# Altium PCB Quasar_ARM_плата.PcbDoc
Units mm, origin at the board's own origin, x right, y up, seen from the top; angles counter-clockwise.
Board outline 110.5 x 70.5 mm, 2 copper layers (Top Layer, Bottom Layer); 124 components, 86 nets, 362 pads, 28 vias.
Unrouted connection lines stored in the file: 1.
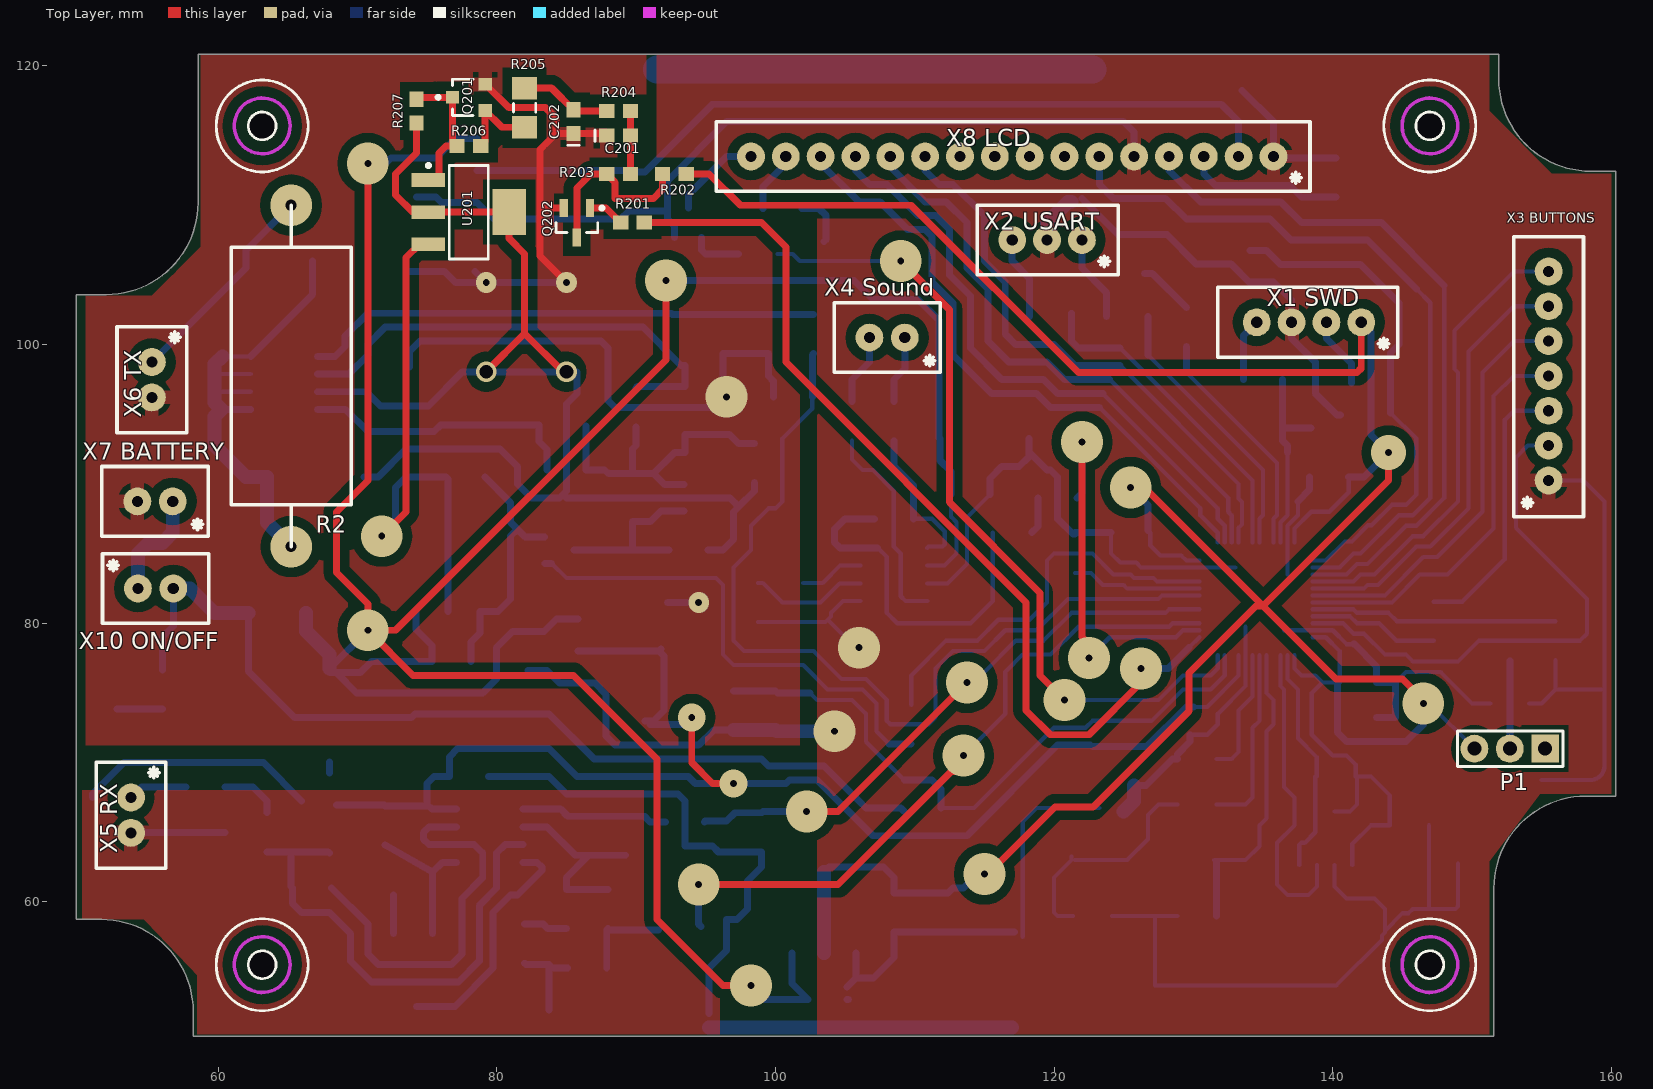
[diagram p0: Top Layer view]
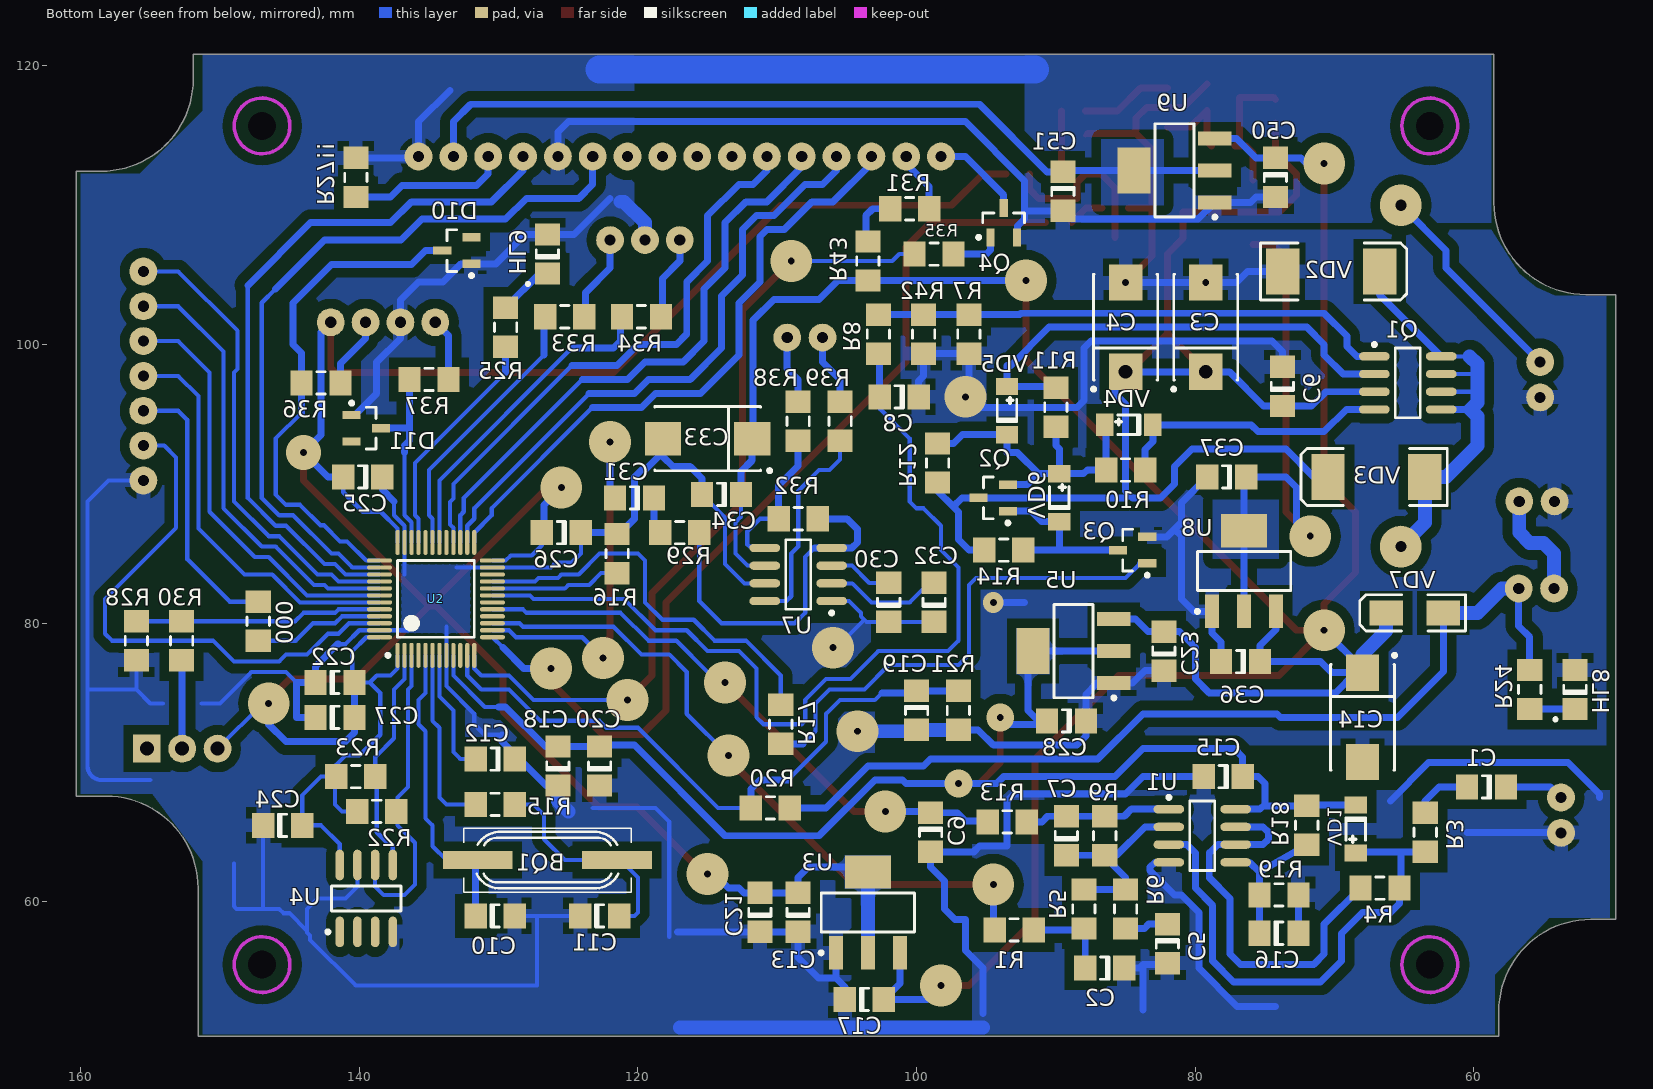
[diagram p1: Bottom Layer view, seen from below]

## Layer stack, top to bottom
Top Layer: signal copper 0.0356
Dielectric: dielectric 0.32, FR-4, Dk 4.8
Bottom Layer: signal copper 0.0356

## Board outline
151.92,120.844 151.92,119.044 ccw(c158.52,119.044) 158.52,112.444 160.32,112.444 160.32,67.594 158.17,67.594 ccw(c158.17,60.994) 151.57,60.994 151.57,50.344 58.22,50.344 58.22,52.144 ccw(c51.62,52.144) 51.62,58.744 49.82,58.744 49.82,103.594 51.97,103.594 ccw(c51.97,110.194) 58.57,110.194 58.57,120.844

## Design rules (kind name [scope] priority, off if disabled: settings)
Clearance Clearance_Polygon [InPolygon vs All  And  Not InNet(GND) And  Not InNet(VDD)  And  Not InNet(VDDA) And Not  InNet('+5V') And  Not InNet('VDDLCD')] p1: gap=0.7
Clearance Clearance_Polygon_1 [InPolygon] p2: gap=0.7
Clearance Clearance_LQFP_Pins [IsPad  And  InComponent(U2)] p3: gap=0.2
Clearance [All] p4: gap=0.2
DiffPairsRouting [All] p1: maxlimit=10 minlimit=0.5 mostfreqgap=0.5 maxuncoupledlength=20
HoleSize [All] p1: absolutevalues=TRUE maxlimit=5 minlimit=0.5 maxpercent=80.000 minpercent=20.000
MinimumSolderMaskSliver [All] p1: minsoldermaskwidth=0
PlaneClearance [All] p1: clearance=0.5
PlaneConnect [All] p1: planeconnectstyle=Direct reliefexpansion=0.508 reliefentries=4 reliefconductorwidth=0.5 reliefairgap=0
PolygonConnect PolygonConnect_VDDLCD [IsPoly And InNet(VDDLCD) vs InNet(VDDLCD)] p1: connectstyle=Direct reliefconductorwidth=0.254 reliefentries=4 polygonreliefangle="90 Angle" airgapwidth=0.254
PolygonConnect PolygonConnect_VIA [IsPoly vs IsVia] p2: connectstyle=Direct reliefconductorwidth=0.254 reliefentries=4 polygonreliefangle="90 Angle" airgapwidth=0.254
PolygonConnect PolygonConnect_+5v [IsPoly And  InNet('+5V') vs InNet('+5V')] p3: connectstyle=Direct reliefconductorwidth=0.254 reliefentries=4 polygonreliefangle="90 Angle" airgapwidth=0.254
PolygonConnect PolygonConnect_VDDA [IsPoly And  InNet(VDDA) vs InNet('VDDA')] p4: connectstyle=Direct reliefconductorwidth=0.254 reliefentries=4 polygonreliefangle="90 Angle" airgapwidth=0.254
PolygonConnect PolygonConnect_VDD [IsPoly  And InNet(VDD) vs InNet('VDD')] p5: connectstyle=Direct reliefconductorwidth=0.254 reliefentries=4 polygonreliefangle="90 Angle" airgapwidth=0.254
PolygonConnect [All] p6: connectstyle=Relief reliefconductorwidth=1 reliefentries=4 polygonreliefangle="90 Angle" airgapwidth=0.4
RoutingCorners [All] p1: cornerstyle=Round minsetback=2.54 maxsetback=5
RoutingVias [All] p1: holewidth=0.6 width=1.5 viastyle="Through Hole" minholewidth=0.5 minwidth=1 maxholewidth=0.8 maxwidth=3
SMDNeckDown [All] p1: percent=100.000
SMDToCorner [All] p1: distance=0
SMDToPlane [All] p1: distance=0
SilkToSilkClearance [All] p1: silktosilkclearance=0.1
SilkToSolderMaskClearance [IsPad] p1: minsilkscreentomaskgap=0 clearancetoexposedcopper=TRUE
SolderMaskExpansion [All] p1: expansion=0.102
Width [All] p1: maxlimit=5 minlimit=0.2 preferedwidth=0.5
20 further rules are at their usual default settings.

## Components (designator, comment, footprint, x,y, rotation, side; value= is the part's Value field where it differs from the comment)
000 "Comment" 8-1206 147.25,80.15 r90 bottom
BQ1 "8 MHz" HC49SMD 126.5,63 r0 bottom
C1 "C1206" 1206 59.1,68.25 r0 bottom
C2 "C1206" 1206 86.5,55.25 r0 bottom
C3 "T492D" D 79.25,101.25 r90 bottom
C4 "T492D" D 85,101.25 r90 bottom
C5 "C1206" 1206 82,57 r270 bottom
C6 "C1206" 1206 73.75,97 r90 bottom
C7 "C1206" 1206 89.25,64.75 r90 bottom
C8 "C1206" 1206 101.25,96.25 r0 bottom
C9 "C1206" 1206 99,65 r270 bottom
C10 "C1206" 1206 130.25,59 r180 bottom
C11 "C1206" 1206 122.75,59 r180 bottom
C12 "C1206" 1206 130.25,70.25 r0 bottom
C13 "C1206" 1206 108.5,59.25 r90 bottom
C14 "T492D" D 68,73.25 r270 bottom
C15 "C1206" 1206 78,69 r0 bottom
C16 "C1206" 1206 74,57.75 r180 bottom
C17 "C1206" 1206 103.75,53 r180 bottom
C18 "C1206" 1206 125.75,69.75 r90 bottom
C19 "C1206" 1206 100,73.75 r270 bottom
C20 "C1206" 1206 122.75,69.75 r90 bottom
C21 "C1206" 1206 111.25,59.25 r90 bottom
C22 "C1206" 1206 141.75,75.75 r180 bottom
C23 "C1206" 1206 82.25,78 r90 bottom
C24 "C1206" 1206 145.5,65.5 r180 bottom
C25 "C1206" 1206 139.75,90.5 r0 bottom
C26 "C1206" 1206 125.5,86.5 r0 bottom
C27 "C1206" 1206 141.75,73.25 r180 bottom
C28 "C1206" 1206 89.25,73 r0 bottom
C30 "C1206" 1206 102,81.5 r90 bottom
C31 "C1206" 1206 120.25,89 r0 bottom
C32 "C1206" 1206 98.75,81.5 r90 bottom
C33 "T492D" D 115,93.25 r0 bottom
C34 "C1206" 1206 114,89.25 r0 bottom
C36 "C1206" 1206 76.75,77.25 r0 bottom
C37 "C1206" 1206 77.75,90.5 r0 bottom
C50 "C1206" 1206 74.25,112 r270 bottom
C51 "C1206" 1206 89.5,111 r270 bottom
C201 "C1206" 0603 88.75,115 r0 top
C202 "C1206" 0603 85.5,116 r90 top
D10 "BZX84-C5V1" SOT23_N 133,106.75 r0 bottom
D11 "BZX84-C5V1" SOT23_N 139.5,94 r180 bottom
HL8 "S1206YGSC" C1206 52.75,75.25 r90 bottom
HL9 "S1206YGSC" C1206 126.5,106.5 r90 bottom
P1 "Header 3" "HDR1X3 - wide area" 155.25,71 r180 top
Q1 "IRF7105" SO-8_N 64.75,97.25 r180 bottom
Q2 "BC846B" SOT23_N 94.5,89 r0 bottom
Q3 "BC846B" SOT23_N 84.5,85.25 r0 bottom
Q4 "BC846B" SOT23_N 93.75,108.75 r90 bottom
Q201 "2N7002" SOT23 78,117.75 r90 top
Q202 "BC846" SOT23_N 85.75,108.75 r270 top
R1 "ERJ8EN" 8-1206 93,58 r180 bottom
R2 "Resistor" "Resistor MLT-2" 65.25,97.5 r0 top
R3 "ERJ8EN" 8-1206 63.5,65 r270 bottom
R4 "ERJ8EN" 8-1206 66.75,61 r180 bottom
R5 "ERJ8EN" 8-1206 88,59.5 r90 bottom
R6 "ERJ8EN" 8-1206 85,59.5 r270 bottom
R7 "ERJ8EN" 8-1206 96.25,100.75 r270 bottom
R8 "ERJ8EN" 8-1206 102.75,100.75 r270 bottom
R9 "ERJ8EN" 8-1206 86.5,64.75 r90 bottom
R10 "ERJ8EN" 8-1206 85,91 r0 bottom
R11 "ERJ8EN" 8-1206 90,95.5 r270 bottom
R12 "ERJ8EN" 8-1206 98.5,91.5 r270 bottom
R13 "ERJ8EN" 8-1206 93.5,65.75 r0 bottom
R14 "ERJ8EN" 8-1206 93.75,85.25 r0 bottom
R15 "ERJ8EN" 8-1206 130.25,67 r180 bottom
R16 "ERJ8EN" 8-1206 121.5,85 r90 bottom
R17 "ERJ8EN" 8-1206 109.75,72.75 r270 bottom
R18 "ERJ8EN" 8-1206 72,65.5 r90 bottom
R19 "ERJ8EN" 8-1206 74,60.5 r0 bottom
R20 "ERJ8EN" 8-1206 110.5,66.75 r180 bottom
R21 "ERJ8EN" 8-1206 97,73.75 r90 bottom
R22 "ERJ8EN" 8-1206 138.75,66.5 r180 bottom
R23 "ERJ8EN" 8-1206 140.25,69 r180 bottom
R24 "ERJ8EN" 8-1206 56,75.25 r90 bottom
R25 "ERJ8EN" 8-1206 129.5,101.25 r270 bottom
R27!! "ERJ8EN" 8-1206 140.25,112 r270 bottom (schematic designator R27!!!!!!!!!!)
R28 "ERJ8EN" 8-1206 156,78.75 r90 bottom
R29 "ERJ8EN" 8-1206 117,86.5 r180 bottom
R30 "ERJ8EN" 8-1206 152.75,78.75 r90 bottom
R31 "ERJ8EN" 8-1206 100.5,109.75 r180 bottom
R32 "ERJ8EN" 8-1206 108.5,87.5 r180 bottom
R33 "ERJ8EN" 8-1206 125.25,102 r0 bottom
R34 "ERJ8EN" 8-1206 119.75,102 r0 bottom
R35 "ERJ8EN" 8-1206 98.75,106.5 r180 bottom
R36 "ERJ8EN" 8-1206 142.75,97.25 r0 bottom
R37 "ERJ8EN" 8-1206 135,97.5 r0 bottom
R38 "ERJ8EN" 8-1206 108.5,94.5 r270 bottom
R39 "ERJ8EN" 8-1206 105.5,94.5 r270 bottom
R42 "ERJ8EN" 8-1206 99.5,100.75 r270 bottom
R43 "ERJ8EN" 8-1206 103.5,106 r270 bottom
R201 "ERJ8EN" 3-0603 89.75,108.75 r0 top
R202 "ERJ8EN" 3-0603 92.75,112.25 r0 top
R203 "ERJ8EN" 3-0603 88.75,112.25 r180 top
R204 "ERJ8EN" 3-0603 88.75,116.75 r0 top
R205 "ERJ8EN" 8-1206 82,117 r90 top
R206 "ERJ8EN" 3-0603 78,114.25 r180 top
R207 "ERJ8EN" 3-0603 74.25,116.75 r270 top
U1 "MCP6022-I/SN" SOIC-SN8_N 79.5,64.75 r180 bottom
U2 "STM32F100C8T6B" LQFP48_N 134.5,81.75 r90 bottom
U3 "LD1117S33TR" SOT-223_N 103.5,59.25 r90 bottom
U4 "AT24C08BN-SP25-B" 8S1_N 139.5,60.25 r90 bottom
U5 "LD1117S33TR" SOT-223_N 88.75,78 r0 bottom
U7 "MC34119D" 751-03_N 108.5,83.5 r0 bottom
U8 "LD1117S50CTR" SOT-223_N 76.5,83.75 r90 bottom
U9 "LD1117S50CTR (for LCD)" SOT-223_N 81.5,112.5 r0 bottom
U201 "LD1117S33CTR" SOT-223_N 78,109.5 r0 top
VD1 "LL4148" MiniMELF 68.5,65 r90 bottom
VD2 "MURS230T3" SMC 70.25,105.25 r180 bottom
VD3 "MURS230T3" SMC 67,90.5 r0 bottom
VD4 "LL4148" MiniMELF 85,94.25 r180 bottom
VD5 "LL4148" MiniMELF 93.5,95.5 r270 bottom
VD6 "LL4148" MiniMELF 89.75,89.25 r270 bottom
VD7 "sk16" SMA 64.25,80.75 r0 bottom
"X1 SWD" "WS-4" WS-4 141.75,101.5 r180 top
"X2 USART" "ws-3" WS-3 122,107.5 r180 top
"X3 BUTTONS" "WS-7" WS-7 155.5,90.25 r90 top
"X4 Sound" "WS-2" WS-2 109.29,100.5 r180 top
"X5 RX" "WS-2" WS-2 53.75,67.5 r270 top
"X6 TX" "WS-2" WS-2 55.25,98.75 r270 top
"X7 BATTERY" "WS-2" WS-2 56.75,88.75 r180 top
"X8 LCD" "WS-16" WS-16 135.75,113.5 r180 top
"X10 ON/OFF" "WS-2" WS-2 54.25,82.5 r0 top

## Footprints (in the part's own frame and the unit in brackets; to place one, negate y for a bottom-side part, rotate by r counter-clockwise, add the part's x,y. Pads: shape width x height; smd on the part's side, far side on the other; paste and mask are expansions set on the pad)
3-0603 [mm] "Chip Resistor; Body 1.6 x 0.9 mm (LxW typ)"
  rect 1.1x1 smd: 1(-0.85,0) 2(0.85,0)
8-1206 [mm] "Chip Resistor; Body 3.1 x 1.6 mm (LxW typ)"
  rect 1.6x1.8 smd: 1(-1.4,0) 2(1.4,0)
  silkscreen extent -0.3,-0.8 0.3,0.8
8S1_N [mm] "SOIC, 8-Leads, Body 4.9x3.9mm, Pitch 1.27mm, IPC Medium Density"
  oval 2.2x0.6 smd: 1(-2.4,1.905) 2(-2.4,0.635) 3(-2.4,-0.635) 4(-2.4,-1.905) 5(2.4,-1.905) 6(2.4,-0.635) 7(2.4,0.635) 8(2.4,1.905)
  silkscreen extent -2.52,-2.5 0.9,2.88, body extent -2,-2.5 2,2.5, height 1.75
0603 [mm] "Chip Capacitor; Body 1.6 x 0.8 mm (LxW typ)"
  rect 1.1x1 smd: 1(-0.85,0) 2(0.85,0)
  silkscreen extent -1.7,-0.4 -1.7,0.4
751-03_N [mm] "SOIC, 8-Leads, Body 4.9x3.9mm, Pitch 1.27mm, IPC Medium Density"
  oval 2.2x0.6 smd: 1(-2.4,1.905) 2(-2.4,0.635) 3(-2.4,-0.635) 4(-2.4,-1.905) 5(2.4,-1.905) 6(2.4,-0.635) 7(2.4,0.635) 8(2.4,1.905)
  silkscreen extent -2.52,-2.5 0.9,2.88, body extent -1.95,-2.45 1.95,2.45, height 1.75
1206 [mm] "Chip Capacitor; Body 3.2 x 1.6 mm (LxW typ)"
  rect 1.6x1.8 smd: 1(-1.4,0) 2(1.4,0)
  silkscreen extent -0.3,-0.8 0.3,0.8
C1206 [mm] "Chip Capacitor; Body 3.2 x 1.6 mm (LxW typ)"
  rect 1.6x1.8 smd: 1(-1.4,0) 2(1.4,0)
  silkscreen extent -2.18,-0.8 0.3,1.44
D [mm] "Capacitor, SM Tantalum; Body 7.3 x 4.3 mm (LxW typ)"
  rect 2.6x2.4 smd: 1(-3.2,0) 2(3.2,0)
  silkscreen extent -4.57,-2.3 3.8,2.43
HC49SMD [mm]
  rect 5x1.3 smd: 1(-5,0) 2(5,0)
  silkscreen extent -6,-2.3 6,2.3
"HDR1X3 - wide area" [mm] "Connector; Header; 3 Position"
  rect 2x2 hole 1: 1(0,0)
  round 2 hole 1: 2(2.54,0) 3(5.08,0)
  silkscreen extent -1.27,-1.27 6.3,1.27
LQFP48_N [mm] "Thin QFP, 48-Leads, Body 7x7mm, Pitch 0.5mm, IPC Medium Density"
  oval 1.8x0.3 smd: 1(-4.05,2.75) 2(-4.05,2.25) 3(-4.05,1.75) 4(-4.05,1.25) 5(-4.05,0.75) 6(-4.05,0.25) 7(-4.05,-0.25) 8(-4.05,-0.75) 9(-4.05,-1.25) 10(-4.05,-1.75) 11(-4.05,-2.25) 12(-4.05,-2.75) 25(4.05,-2.75) 26(4.05,-2.25) 27(4.05,-1.75) 28(4.05,-1.25) 29(4.05,-0.75) 30(4.05,-0.25) 31(4.05,0.25) 32(4.05,0.75) 33(4.05,1.25) 34(4.05,1.75) 35(4.05,2.25) 36(4.05,2.75)
  oval 0.3x1.8 smd: 13(-2.75,-4.05) 14(-2.25,-4.05) 15(-1.75,-4.05) 16(-1.25,-4.05) 17(-0.75,-4.05) 18(-0.25,-4.05) 19(0.25,-4.05) 20(0.75,-4.05) 21(1.25,-4.05) 22(1.75,-4.05) 23(2.25,-4.05) 24(2.75,-4.05) 37(2.75,4.05) 38(2.25,4.05) 39(1.75,4.05) 40(1.25,4.05) 41(0.75,4.05) 42(0.25,4.05) 43(-0.25,4.05) 44(-0.75,4.05) 45(-1.25,4.05) 46(-1.75,4.05) 47(-2.25,4.05) 48(-2.75,4.05)
  silkscreen extent -4.17,-2.75 2.75,3.58, body extent -3.5,-3.5 3.5,3.5, height 1.6
MiniMELF [mm]
  rect 1.25x1.6 smd: 1(-1.49,-0.01) 2(1.96,-0.01)
  silkscreen extent -0.7,-0.71 1.03,0.69
"Resistor MLT-2" [mm]
  round 3 hole 0.8: 1(0,12.5) 2(0,-12)
  silkscreen extent -4.3,-12 4.3,12.5
SMA [mm] "DO-214-AC/SMA; 2 C-Bend Leads; Body 5 x 2.7 mm, inc. leads (LxW)"
  rect 2.4x1.8 smd: 1(-2.05,0) 2(2.05,0)
  silkscreen extent -3.65,-1.3 3.95,1.3
SMC [mm] "DO-214-AB/SMC; 2 C-Bend Leads; Body 7.9 x 5.9 mm, inc. leads (LxW)"
  rect 2.4x3.3 smd: 1(-3.475,0) 2(3.475,0)
  silkscreen extent -5.07,-2.05 5.43,2.05
SO-8_N [mm] "SOIC, 8-Leads, Body 4.9x3.9mm, Pitch 1.27mm, IPC Medium Density"
  oval 2.2x0.6 smd: 1(-2.4,1.905) 2(-2.4,0.635) 3(-2.4,-0.635) 4(-2.4,-1.905) 5(2.4,-1.905) 6(2.4,-0.635) 7(2.4,0.635) 8(2.4,1.905)
  silkscreen extent -2.53,-2.5 0.9,2.88, body extent -2,-2.5 2,2.5, height 1.75
SOIC-SN8_N [mm] "SOIC, 8-Leads, Body 4.9x3.8mm, Pitch 1.27mm, IPC Medium Density"
  oval 2.2x0.6 smd: 1(-2.4,1.905) 2(-2.4,0.635) 3(-2.4,-0.635) 4(-2.4,-1.905) 5(2.4,-1.905) 6(2.4,-0.635) 7(2.4,0.635) 8(2.4,1.905)
  silkscreen extent -2.53,-2.5 0.9,2.88, body extent -2,-2.5 2,2.5, height 1.75
SOT23 [mm] "SOT-23; 3 Leads; Body 3.1 x 2.5 mm, inc. leads (LxW max), Alternate Lead Configuration"
  rect 0.9x0.95 smd: 1(0,1.175) 2(0.95,-1.175) 3(-0.95,-1.175)
  silkscreen extent -1.3,-0.3 1.3,2.32
SOT23_N [mm] "SOT23, 3-Leads, Body 2.9x1.3mm, Pitch 0.95mm, Lead Span 2.3mm, IPC Medium Density"
  rect 1.3x0.6 smd: 1(-1.05,0.95) 2(-1.05,-0.95) 3(1.05,0)
  silkscreen extent -1.17,-1.5 0.7,1.92, body extent -0.7,-1.5 0.7,1.5, height 1.1
SOT-223_N [mm] "SOT223, 4-Leads, Body 6.5x3.5mm, Pitch 2.3mm, Lead Span 7mm, IPC Medium Density"
  rect 2.4x1 smd: 1(-2.9,2.3) 2(-2.9,0) 3(-2.9,-2.3)
  rect 2.4x3.3 smd: 4(2.9,0)
  silkscreen extent -3.02,-3.35 1.4,3.48, body extent -1.85,-3.35 1.85,3.35, height 1.8
WS-2 [mm] "Connector 2-pin"
  round 2 hole 0.8: 1(0,0) 2(2.54,0)
  silkscreen extent -2.54,-2.5 5.08,2.5
WS-3 [mm] "Connector 3-pin"
  round 2 hole 0.8: 1(0,0) 2(2.5,0) 3(5,0)
  silkscreen extent -2.62,-2.5 7.5,2.5
WS-4 [mm] "Connector 4-pin"
  round 2 hole 0.8: 1(-0.3,-0.1) 2(2.2,-0.1) 3(4.7,-0.1) 4(7.2,-0.1)
  silkscreen extent -2.92,-2.6 10,2.4
WS-7 [mm] "Connector 7-pin"
  round 2 hole 0.8: 1(0,0) 2(2.5,0) 3(5,0) 4(7.5,0) 5(10,0) 6(12.5,0) 7(15,0)
  silkscreen extent -2.62,-2.5 17.5,2.5
WS-16 [mm] "Connector 16-pin"
  round 2 hole 0.8: 1(0,0) 2(2.5,0) 3(5,0) 4(7.5,0) 5(10,0) 6(12.5,0) 7(15,0) 8(17.5,0) 9(20,0) 10(22.5,0) 11(25,0) 12(27.5,0) 13(30,0) 14(32.5,0) 15(35,0) 16(37.5,0)
  silkscreen extent -2.62,-2.5 40,2.5

## Part data
BQ1: library part XTAL, "Crystal Oscillator"
C1 C2 C5 C6 C7 C8 C9 C10 C11 C12 C13 C15 C16 C17 C18 C19 C20 C21 C22 C23 C24 C25 C26 C27 C28 C30 C31 C32 C34 C36 C37 C50 C51 C201 C202: "Ceramic Chip Capacitor - Standard"
C3 C4 C14 C33: "Solid Tantalum Chip Capacitor, T492 Series - CWR11 Style Per Mil-PRF-55365/8"
D10 D11: "Voltage Regulator Diode"
HL8 HL9: library part "LED CMD", "Typical INFRARED GaAs LED"
P1: "Header, 3-Pin"
Q1: "HEXFET Power MOSFET"
Q2 Q3 Q4 Q202: "NPN General-purpose Transistor"
Q201: "N-Channel Enhancement Mode Vertical DMOS FET"
R1 R3 R4 R5 R6 R7 R8 R9 R10 R11 R12 R13 R14 R15 R16 R17 R18 R19 R20 R21 R22 R23 R24 R25 R27!! R28 R29 R30 R31 R32 R33 R34 R35 R36 R37 R38 R39 R42 R43 R201 R202 R203 R204 R205 R206 R207: "Precision Thick Film Chip Resistor, 10 Ohm to 2.2M Ohm Range, 1% Tolerance, 1206 Size, 0.125 W"
R2: library part Resistor_MLT
U1: "Rail-to-Rail Input/Output, 10 MHz Operational Amplifier, 8-Pin SOIC, Industrial Temperature"
U2: "STM32 ARM-based 32-bit MCU Value Line with 64 kB Flash, 8 kB Internal RAM, Internal Code B, -40 to +85°C Temperature, 48-Pin LQFP, Tray"
U3 U5: "Fixed Low Drop Positive Voltage Regulator, 3.3V, 4-Pin SOT-223, Tape and Reel"
U4: "8Kbit (1024 x 8), 2-wire Bus Automotive Serial EEPROM with Write Protect, 2.5V, 8-Pin SOIC, Bulk"
U7: "Low-Power Audio Amplifier"
U8: "Fixed Low Drop Positive Voltage Regulator, 5V, 4-Pin SOT-223, Tape and Reel"
U9 U201: library part LD1117S50CTR, "Fixed Low Drop Positive Voltage Regulator, 5V, 4-Pin SOT-223, Tape and Reel"
VD1 VD4 VD5 VD6: library part Diode
VD2 VD3: library part 30BQ015, "Schottky Rectifier"
VD7: library part 10MQ060N, "Schottky Rectifier"

## Free pads (board coordinates)
  round 0 hole 2: 0(146.975,55.5) 1(63.175,55.5) 2(63.175,115.7) 3(146.975,115.7)

## Via types
v1: diameter 3, hole 0.5, Top Layer to Bottom Layer, 20 vias
v2: diameter 1.5, hole 0.5, Top Layer to Bottom Layer, 3 vias
v3: diameter 1.5, hole 1, Top Layer to Bottom Layer, 2 vias
v4: diameter 2.5, hole 0.5, Top Layer to Bottom Layer, 1 vias
v5: diameter 2, hole 0.5, Top Layer to Bottom Layer, 1 vias
v6: diameter 2, hole 0.5, Top Layer to Bottom Layer, tented top, 1 vias

## Nets (pads, with @x,y where several pads share a name; then routed paths per layer and width w, separated by ;. In a path a pad name is that pad's centre, name@x,y a point inside that pad or via, vN(x,y) a via of type N, cw(c..) or ccw(c..) an arc to the next point about the centre after c; other vN are vias at no path point)
+5V: C37.1 U8.2 U8.4 U201.3 | length 41.8
  Top Layer w0.5: v1(71.75,86.25) 73.5,88 73.5,106.25 74.45,107.2 U201.3@75.85,107.2
  Bottom Layer w0.5: v1@72.4,86.65 72,86.25 v1(71.75,86.25) 72.75,87.25 72.75,89.75 73.5,90.5 C37.1 76.5,90.35 U8.4 U8.2
+BATT: "X10 ON/OFF.2" R20.2 R24.2 VD7.1 | length 67.9
  Bottom Layer w0.5: R24.2 56,79 56.79,79.79 56.79,82.5 ; VD7.1 62.2,76.55 65.5,73.25 73.875,73.25 74.125,73.5 83.75,73.5 87,70.25 99,70.25 99.5,69.75 103.5,69.75 106.5,66.75 109,66.75 R20.2@109.25,66.5
  Bottom Layer w1: 56.79,82.5 58,82.5 59.75,80.75 VD7.1
+UP: C14.1 C17.2 C23.2 C33.1 C34.1 C36.1 C50.1 R43.2 U3.3 U5.3 U7.6 U8.3 U9.3 VD7.2 | length 214.8
  Top Layer w0.5: v1(70.75,113) 70.75,90.25 68.5,88 68.5,83.645 70.75,81.395 v1(70.75,79.5) ; v1(92.15,104.6) 92.15,98.9 72.75,79.5 v1(70.75,79.5) ; v1(98.25,54) 96.25,54 91.5,58.75 91.5,70.25 85.5,76.25 74,76.25 v1(70.75,79.5)
  Bottom Layer w0.3: U7.6 112.135,84.135 113,85 113,87.25 112.6,87.65 C34.1
  Bottom Layer w0.5: v1(70.75,79.5) 68,76.75 C14.1 C14.1@68.5,76.45 ; v1(70.75,113) 72,113 72.4,113.4 C50.1 75.65,113.4 77.05,114.8 U9.3 ; U8.3 74.2,79.55 75.35,78.4 C36.1 71,77.25 70.2,76.45 C14.1@68.5,76.45 ; U5.3 84.3,80.3 83.4,79.4 C23.2 81.15,79.4 80,78.25 80,76 79,75 69.95,75 C14.1@68.5,76.45 ; v1(92.15,104.6) R43.2 105.65,104.6 107,103.25 110.25,103.25 111.75,101.75 C33.1@111.75,93.3 ; v1(98.25,54) 99.25,53 C17.2 101.2,54.15 U3.3 ; C33.1 111.8,91.7 112.6,90.9 C34.1
  Bottom Layer w1: VD7.2 66.3,79.45 68,77.75 C14.1@68,76.75
BLIGHT: R35.1 U2.12 | length 58.3
  Top Layer w0.5: v1(109,106) 112.5,102.5 112.5,88.687 119,82.187 119,76.25 v1(120.75,74.5)
  Bottom Layer w0.3: R35.1 101.25,106.5 101.75,106 v1(109,106) ; v1(120.75,74.5) 127.5,74.5 129.25,76.25 131.25,76.25 131.75,76.75 U2.12
BOOT0: R28.2 R30.2 U2.44 | length 17.8
  Bottom Layer w0.3: U2.44 141.487,81 141.737,80.75 144,80.75 144.6,80.15 R30.2 R28.2
BTN0: "X3 BUTTONS.2" U2.46 | length 39.1
  Bottom Layer w0.3: U2.46 140.75,80 141.5,79.25 142.25,79.25 143.75,77.75 145.25,77.75 145.75,77.25 149,77.25 150.5,78.75 157.75,78.75 158.25,79.25 158.25,81.75 153.15,86.85 153.15,91.9 154,92.75 155.5,92.75
BTN1: 000.1 000.2 "X3 BUTTONS.3" U2.45 | length 29.2
  Bottom Layer w0.3: U2.45 141.25,80.5 141.75,80 143.313,80 144.563,78.75 000.1 ; 000.2 149.3,81.55 152.35,84.6 152.35,94.6 153,95.25 155.5,95.25
BTN2: "X3 BUTTONS.4" U2.43 | length 29.2
  Bottom Layer w0.3: U2.43 144.25,81.5 146.25,83.5 148.25,83.5 151.55,86.8 151.55,96.3 153,97.75 155.5,97.75
BTN3: "X3 BUTTONS.5" U2.42 | length 30.4
  Bottom Layer w0.3: U2.42 143.75,82 146.5,84.75 147.5,84.75 150.75,88 150.75,98 153,100.25 155.5,100.25
BTN4: "X3 BUTTONS.6" U2.41 | length 31.9
  Bottom Layer w0.3: U2.41 142.25,82.5 142.5,82.75 143.25,82.75 146,85.5 147,85.5 149.75,88.25 149.75,99.5 153,102.75 155.5,102.75
BTN5: "X3 BUTTONS.7" U2.40 | length 33.7
  Bottom Layer w0.3: U2.40 141.5,83 142,83.5 143,83.5 145.75,86.25 146.5,86.25 149,88.75 149,98 148.75,98.25 148.75,101 153,105.25 155.5,105.25
EE_SCL: R22.2 U2.3 U4.6 | length 22.3
  Bottom Layer w0.3: U2.3 136.25,75.5 136.5,75.25 136.5,68.25 137.25,67.5 137.25,65.5 136,64.25 136,61.25 136.75,60.5 138.25,60.5 138.865,61.115 U4.6
EE_SDA: R23.2 U2.2 U4.5 | length 16.5
  Bottom Layer w0.3: U2.2 136.75,76 137.5,75.25 137.5,71.75 138.85,70.4 R23.2 ; U4.5 137.595,64.095 137.75,64.25 138,64.25 138.75,65 R23.2@138.75,69
GND: "X1 SWD.3" "X2 USART.2" "X3 BUTTONS.1" "X5 RX.2" "X6 TX.2" "X7 BATTERY.2" "X8 LCD.1" "X8 LCD.5" C2.1 C3.2 C4.2 C5.2 C6.2 C8.1 C9.2 C10.2 C11.1 C12.1 C13.1 C14.2 C15.2 C16.2 C17.1 C18.1 C19.2 C20.1 C21.1 C22.1 C23.1 C24.1 C25.1 C26.1 C27.1 C28.1 C30.1 C32.1 C33.2 C34.2 C36.2 C37.2 C50.2 C51.2 C201.1 C202.1 D10.1 D11.1 HL8.2 HL9.2 Q3.2 Q4.2 Q201.2 Q202.2 R7.2 R16.2 R19.1 R21.1 R27!!.1 R28.1 R42.2 U1.4 U2.8 U2.23 U2.35 U2.47 U3.1 U4.4 U4.7 U5.1 U7.1 U7.7 U8.1 U9.1 VD2.1 | length 579.2
  Top Layer w0.3: C201.1@87.75,115.15 C201.1
  Top Layer w0.5: Q201.2 80.875,117 83.5,117 84.25,116.25 84.25,115.4 84.5,115.15 ; 83.3,109.8 Q202.2 ; v2(85,104.45) 83.1,106.35 83.1,114 84.25,115.15 84.5,115.15 ; C201.1@87.75,115.15 C202.1 84.5,115.15
  Bottom Layer w0.3: C32.1 C30.1 103.6,80.1 104,80.5 104,80.75 104.845,81.595 U7.1 ; 103.8,80.2 105.75,78.25 v1(106,78.25) ; U7.7 112.365,82.865 113.75,84.25 113.75,87.6 C34.2 ; 117.75,57.5 117.75,65.75 118.75,66.75 123.25,66.75 ; C26.1 124.1,85 124.75,84.35 125.9,84.35 126.25,84 U2.23 133,84 ; C11.1 127.25,59 ; C10.2 127.25,59 ; C12.1 C12.1@128.85,70.6 ; 129.75,72 131,72 131.75,72.75 131.75,73.5 133.75,75.5 U2.8 133.75,79.75 ; 136.5,79.5 U2.47 140,79.5 141,78.5 141.5,78.5 ; 136.75,83.5 U2.35 136.75,87 137.5,87.75 137.5,88.75 ; U4.7 140.135,61.115 141,60.25 143,60.25 143.75,59.5 143.75,57.927 ; 144.5,75.75 145.25,76.5 147.75,76.5 150,74.25 151.31,74.25 ; 146.9,59.646 C24.1 ; 149,62.75 149,59.688 148.808,59.496 145.75,59.496 145.446,59.192 145.016,59.192 143.75,57.927 ; 154.11,74.25 155,74.25 156,75.25 ; 155,68.75 158.5,68.75 ccw(c158.5,69.75) 159.5,69.75 159.5,75.25 ; 155.5,90.25 158,90.25 159.5,88.75 159.5,75.25 ; R28.1 156,75.25 ; 127.25,59 127.25,54 140.25,54 143.527,57.277 143.527,57.595 143.75,57.818 143.75,57.927 ; 156,75.25 159.5,75.25
  Bottom Layer w0.5: 51,67.5 51,67.75 53.25,70 63.25,70 66,67.25 ; 53.79,65 60.5,65 ; C14.2@68,69.25 C14.2 ; C16.2 R19.1 ; VD2.1 76.25,105.25 77.05,104.45 v2(79.25,104.45) ; C6.2 73.75,99.5 74.5,100.25 87.5,100.25 88,99.75 88,96 88.5,95.5 95.75,95.5 v1(96.5,96.25) 96.25,96.5 R7.2 R42.2 99.5,97.75 99.85,97.4 C8.1 ; 74.25,52.5 77,52.5 79.75,55.25 79.75,59.25 81,60.5 81.5,60.5 83.25,62.25 83.25,62.5 82.905,62.845 U1.4 ; C50.2 75.65,110.6 76.05,110.2 U9.1 79.8,109 88.9,109 C51.2 92.25,109.6 ; C36.2 78.15,78.65 78.8,79.3 U8.1 80.1,80.85 81,81.75 81,86.25 81.5,86.75 ; C3.2@78.45,105.25 v2(79.25,104.45) ; C37.2 81,88.65 81,87.25 81.5,86.75 ; C15.2 83.75,69 85,67.75 93,67.75 93.5,67.25 93.5,64 95.5,64 95.9,63.6 C9.2 99,62.5 98,61.5 98,59.5 97.25,58.75 96.5,58.75 96.5,56.5 95.25,55.25 95.25,52 ; C5.2 82.1,55.5 83.75,55.5 ; C23.1 83.6,76.6 84.5,75.7 U5.1 87.05,75.7 87.85,74.9 C28.1 87.85,71.9 88.5,71.25 94.5,71.25 95.6,72.35 R21.1 ; Q3.2 82.05,86.2 81.5,86.75 ; 83.75,52.25 83.75,55.5 ; v2(85,104.45) v2(79.25,104.45) ; C2.1 84,55.25 83.75,55.5 ; 92.25,81.5 v2(94.5,81.5) ; Q4.2@92.75,107.7 92.75,108.5 92.25,109 92.25,109.6 ; C17.1 C17.1@105.25,53 ; 105.15,53.9 105.8,54.55 ; U3.1 105.8,54.55 ; C34.2 115.4,90.4 116.25,91.25 117.5,91.25 118.2,91.95 C33.2@118.2,92.3 ; 117.15,57.85 C21.1 C13.1 108.5,56 107.05,54.55 105.8,54.55 ; C33.2 C33.2@118.2,92.3 ; R16.2 121.35,86.4 120.25,87.5 120.25,90.5 119.75,91 119.5,91 C33.2@118.2,92.3 ; R16.2@121.5,86.5 C26.1 ; 122,110.5 124.6,107.9 HL9.2 128.1,107.9 130.2,105.8 D10.1 132.7,105.8 134,104.5 135.75,104.5 137.05,103.2 137.05,101.6 137.05,100.45 138.75,98.75 138.75,96.5 140.3,94.95 D11.1 ; C18.1 126.6,68.35 128.5,70.25 C12.1 ; 125.75,113.5 125.75,115.25 125,116 96.5,116 92.25,111.75 92.25,109.6 ; C12.1@128.85,70.6 129.75,71.5 129.75,72 ; 133.5,118.25 135.75,116 135.75,113.5 ; 135.85,113.4 R27!!.1 ; 137.5,88.75 138.35,89.6 C25.1 ; 141.5,78.5 141.55,78.5 143.15,76.9 C22.1 144.5,75.75 144.5,73.25 C27.1
  Bottom Layer w1: 95.25,51 117,51 ; R21.1 C19.2 ; C19.2@100.1,72.25 v1(104.25,72.25) ; 119.5,107.5 119.5,108.75 121,110.25 121.25,110.25 ; 125,66.5 125.75,67.25 C18.1
  Bottom Layer w2: 91.5,119.75 122.75,119.75
HLED: R25.2 U2.33 | length 16.8
  Bottom Layer w0.3: 129.5,98 136,91.5 136,87.75 135.75,87.5 U2.33
  Bottom Layer w0.5: 129.5,98 R25.2
I_TX: C8.2 R8.2 U2.19 | length 66
  Bottom Layer w0.3: C8.2 102.65,95.4 100.5,93.25 100.5,88.75 100,88.25 99.5,88.25 98.25,87 98.25,85.25 97,84 97,78.75 97.75,78 102.75,78 104.75,76 106.5,76 108,74.5 108,73 108.25,72.75 111,72.75 111.5,73.25 111.5,76.75 112.75,78 115,78 116.5,79.5 118.75,79.5 121,81.75 127.5,81.75 127.75,82 U2.19
  Bottom Layer w0.5: C8.2 102.65,99.25 R8.2
LCD_D4: "X8 LCD.11" U2.28 | length 41.3
  Bottom Layer w0.3: 124.75,98.5 133.25,90 133.25,88.95 133.5,88.7 133.5,87.1 133.25,86.85 U2.28
  Bottom Layer w0.5: 110.75,113.5 110.75,112.5 111.75,111.5 112.75,111.5 115,109.25 115,106 116.5,104.5 116.5,100.75 117.25,100 120,100 121.5,98.5 124.75,98.5
LCD_D5: "X8 LCD.12" U2.27 | length 42.2
  Bottom Layer w0.3: 124,97.5 132.5,89 132.5,88 132.75,87.75 U2.27
  Bottom Layer w0.5: 108.25,113.5 108.25,112.75 110.75,110.25 112.25,110.25 113.75,108.75 113.75,105.5 115.25,104 115.25,100.25 116.75,98.75 119.5,98.75 120.75,97.5 124,97.5
LCD_D6: "X8 LCD.13" U2.26 | length 43.8
  Bottom Layer w0.3: 123.5,96.5 131.75,88.25 131.75,87.5 132.25,87 U2.26
  Bottom Layer w0.5: 105.75,113.5 105.75,112.5 106.75,111.5 108,111.5 110.25,109.25 111.5,109.25 112.5,108.25 112.5,105 114,103.5 114,99.75 116.25,97.5 119.25,97.5 120.25,96.5 123.5,96.5
LCD_D7: "X8 LCD.14" U2.25 | length 45.1
  Bottom Layer w0.3: 123.25,95.5 130.5,88.25 130.5,87.75 131.75,86.5 U2.25
  Bottom Layer w0.5: 103.25,113.5 103.25,113 106,110.25 107.5,110.25 109.5,108.25 110.75,108.25 111.25,107.75 111.25,104.5 112.75,103 112.75,99.25 115.5,96.5 118.75,96.5 119.75,95.5 123.25,95.5
LCD_E: "X8 LCD.6" U2.38 | length 53.8
  Bottom Layer w0.3: U2.38 140.5,84 141.5,85 142,85 144.75,87.75 145.75,87.75 147,89 147,103 146,104
  Bottom Layer w0.5: 123.25,113.5 123.25,111.5 124.25,110.5 128,110.5 129.5,109 135.5,109 137,107.5 142.5,107.5 146,104
LCD_RS: "X8 LCD.4" U2.39 | length 51.1
  Bottom Layer w0.3: U2.39 141,83.5 141.75,84.25 142.5,84.25 145.25,87 146,87 148,89 148,104.25
  Bottom Layer w0.5: 128.25,113.5 128.25,112.5 130.5,110.25 136.25,110.25 137.75,108.75 143.5,108.75 148,104.25
NetBQ1_1: BQ1.1 C11.2 R15.2 | length 16
  Bottom Layer w0.3: BQ1.1@121.25,63.25 121.25,63 120,61.75 120,59.25 120.25,59 C11.2 ; BQ1.1 125.25,63 126.75,64.5 126.75,66.25 127.5,67 R15.2
NetBQ1_2: BQ1.2 C10.1 U2.5 | length 21.8
  Bottom Layer w0.3: BQ1.2 133.75,63 134.75,64 134.75,65.5 135.25,66 135.25,72.25 135.75,72.75 135.75,74.5 135.25,75 U2.5
  Bottom Layer w0.5: C10.1 BQ1.2@131.65,62.85
NetC1_1: "X5 RX.1" C1.1 | length 4.3
  Bottom Layer w0.5: 53.75,67.5 54.5,68.25 C1.1
NetC1_2: C1.2 R3.1 | length 4.3
  Bottom Layer w0.5: C1.2 62.5,68.25 63.5,67.25 R3.1
NetC2_2: C2.2 R1.2 R5.1 | length 6.4
  Bottom Layer w0.5: C2.2 87.9,58 R5.1 ; R5.1@88.1,58 R1.2
NetC3_1: C3.1 C4.1 C6.1 Q1.3 Q2.3 R12.2 R14.2 R207.2 U201.2 U201.4 VD3.2 | length 98.1
  Top Layer w0.5: R207.2 74.25,113.75 72.75,112.25 72.75,110.75 74,109.5 U201.2 U201.4 80.9,107.6 82,106.5 82,100.8 ; v3(79.25,98.05) 82,100.8 ; v3(85,98.05) 84.75,98.05 82,100.8
  Bottom Layer w0.5: Q1.3 70.635,96.615 71.65,95.6 C6.1 75.1,95.6 77.55,98.05 v3(79.25,98.05) v3(85,98.05) 85.75,98.05 85.75,96.5 85,95.75 85,89.5 84.75,89.25 ; VD3.2 71.5,90.5 73.5,92.5 80.25,92.5 81.5,91.25 81.5,90 82.5,89 84.5,89 84.75,89.25 ; R14.2 96.25,85.25 97,86 97,88 97.375,88.375 ; Q2.3@95.5,89 85,89 84.75,89.25 ; Q2.3 96.75,89 97.375,88.375 ; R12.2 98.5,89.5 97.375,88.375
NetC5_1: C5.1 R6.2 | length 3.1
  Bottom Layer w0.5: C5.1 83.35,58.4 83.65,58.1 R6.2
NetC7_1: C7.1 R5.2 R6.1 R9.1 U1.2 | length 14.3
  Bottom Layer w0.5: U1.2 83.615,65.385 85.65,63.35 R9.1 ; R5.2 R6.1 85,61.75 86.5,63.25 R9.1 ; C7.1 R9.1
NetC7_2: C7.2 R9.2 R13.1 U1.1 | length 10.6
  Bottom Layer w0.5: U1.1 84.595,66.655 85.1,66.15 R9.2 C7.2 90.6,66.15 91,65.75 R13.1
NetC16_1: C16.1 R18.1 R19.2 U1.5 | length 10.3
  Bottom Layer w0.5: R18.1 75.4,62.15 ; C16.1 R19.2 75.4,62.15 ; U1.5 76.095,62.845 75.4,62.15
NetC30_2: C30.2 U7.3 | length 4.6
  Bottom Layer w0.3: C30.2 103.4,82.9 104.635,84.135 U7.3
NetC31_1: C31.1 R29.1 | length 2.7
  Bottom Layer w0.5: R29.1 118.85,86.95 C31.1
NetC32_2: C32.2 U7.2 | length 8.5
  Bottom Layer w0.3: C32.2 99.1,82.9 100.5,81.5 103.25,81.5 104.615,82.865 U7.2
NetC201_2: C201.2 R203.1 R204.2 | length 4.5
  Top Layer w0.5: R203.1 C201.2 R204.2
NetC202_2: C202.2 R204.1 R205.2 | length 6.6
  Top Layer w0.5: R205.2 83.95,118.4 C202.2 85.6,116.75 R204.1
NetHL8_1: HL8.1 R24.1 | length 3.2
  Bottom Layer w0.5: HL8.1 R24.1
NetHL9_1: HL9.1 R25.1 | length 4
  Bottom Layer w0.5: HL9.1 127.05,105.1 R25.1
NetP1_2: P1.2 R30.1 | length 6.4
  Bottom Layer w0.3: R30.1@152.71,77.31 R30.1
  Bottom Layer w0.5: P1.2 R30.1@152.71,77.31
NetQ1_1: Q1.1 R7.1 R8.1 R42.1 | length 37.4
  Bottom Layer w0.5: Q1.1 68.405,99.155 69.125,99.875 69.125,100.625 70.75,102.25 92.5,102.25 92.6,102.15 R7.1 R42.1 R8.1
NetQ1_2: Q1.2 R11.1 VD5.1 | length 34.4
  Bottom Layer w0.5: Q1.2 69.385,97.885 70.75,99.25 70.75,100 72,101.25 90.5,101.25 93.24,98.51 93.51,98.51 VD5.1 90.09,96.99 R11.1
NetQ1_4: Q1.4 R10.1 VD4.2 | length 20.2
  Bottom Layer w0.5: Q1.4 69.155,95.345 70.75,93.75 75.496,93.75 75.986,94.24 VD4.2 83.04,93.04 83.6,92.48 R10.1
NetQ1_5: Q1.5 Q1.6 Q1.7 Q1.8 R2.2 VD2.2 VD3.1 | length 35.5
  Bottom Layer w0.3: 59.75,96.615 Q1.6 ; 59.75,97.885 Q1.7 ; 60.31,99.155 Q1.8
  Bottom Layer w0.5: 60.25,95.345 Q1.5 ; Q1.8 66.775,103.58 VD2.2@66.775,106
  Bottom Layer w1: 60.31,99.155 59.75,98.595 59.75,97.885 59.75,96.615 59.75,95.845 60.25,95.345 59.75,94.845 59.75,92.75 62,90.5 VD3.1 63.525,87.225 R2.2
NetQ2_1: Q2.1 Q3.3 R14.1 VD6.2 | length 12.8
  Bottom Layer w0.5: Q3.3 R14.1 ; 89.76,85.26 VD6.2 91.04,87.29 91.8,88.05 Q2.1
NetQ2_2: Q2.2 R10.2 R11.2 R12.1 VD4.1 VD5.2 VD6.1 | length 23.5
  Bottom Layer w0.5: VD4.1@86.4,94.15 R10.2 87.75,91 88.01,90.74 VD6.1 ; R11.2 90,92.75 89.76,92.51 VD6.1 ; Q2.2 92.05,89.95 91.26,90.74 ; R12.1 97.35,92.9 96.71,93.54 VD5.2 93.51,92.24 92.76,92.24 91.26,90.74 ; VD6.1 91.26,90.74
NetQ3_1: Q3.1 R17.2 | length 35.8
  Bottom Layer w0.3: Q3.1@83.95,84.3 85,83.25 95.75,83.25 96.25,82.75 96.25,77.75 97,77 102,77 103.75,75.25 106.25,75.25 107.25,74.25 107.25,72.25 108.15,71.35
  Bottom Layer w0.5: Q3.1 Q3.1@83.95,84.3 ; 108.15,71.35 R17.2
NetQ4_1: Q4.1 R35.2 | length 3.7
  Bottom Layer w0.5: Q4.1 94.7,106.8 95,106.5 R35.2
NetQ4_3: "X8 LCD.16" Q4.3 | length 6.6
  Bottom Layer w0.5: Q4.3 93.75,110.75 96.5,113.5 98.25,113.5
NetQ201_1: Q201.1 R206.2 R207.1 U201.1 | length 9.7
  Top Layer w0.5: R207.1 74.4,117.75 Q201.1 76.825,114.575 R206.2 76.35,114.25 75.85,113.75 U201.1@75.85,111.8
NetQ201_3: Q201.3 R205.1 R206.1 | length 6
  Top Layer w0.5: R206.1 79.175,114.575 Q201.3 80.375,115.6 R205.1
NetQ202_1: Q202.1 R201.1 | length 2.6
  Top Layer w0.5: Q202.1 87.85,109.8 R201.1
NetQ202_3: Q202.3 R202.1 R203.2 | length 12.9
  Top Layer w0.5: Q202.3 85.75,111.25 86.75,112.25 R203.2 88.5,111.65 88.5,110.5 91.25,110.5 91.9,111.15 R202.1
NetR2_1: "X6 TX.1" R2.1 | length 15.4
  Bottom Layer w0.5: 55.25,98.75 62,105.5 62,106.75 R2.1
NetR3_2: R3.2 R4.2 U1.3 VD1.1 | length 36.2
  Bottom Layer w0.5: R3.2 65.25,63.6 ; VD1.1@67.99,63.51 67.9,63.6 65.25,63.6 ; U1.3 80.615,64.115 80,63.5 80,61 78.75,59.75 78.75,55.75 77.25,54.25 71,54.25 69.5,55.75 69.5,57.75 68,59.25 66,59.25 65.35,59.9 R4.2 65.25,61.1 65.25,63.6
NetR15_1: R15.1 U2.6 | length 13.2
  Bottom Layer w0.3: R15.1 133.75,67 134.25,67.5 134.25,72.5 134.75,73 134.75,74.25 U2.6
NetR16_1: R16.1 U2.20 | length 9.4
  Bottom Layer w0.3: R16.1 122.65,83.6 123.5,82.75 125,82.75 125.25,82.5 U2.20
NetR27!!!!!!!!!!_2: "X8 LCD.3" R27!!.2 | length 11.4
  Bottom Layer w0.5: 130.75,113.5 130.75,112.25 131.575,111.425 136.925,111.425 137.75,110.6 R27!!.2
NetR29_2: R29.2 R32.2 U7.4 | length 25.8
  Bottom Layer w0.3: 107.345,85.405 108,84.75 108,80.75 108.75,80 114,80 115.6,81.6 R29.2
  Bottom Layer w0.5: R32.2 105,87.5 104.25,86.75 104.25,85.81 104.655,85.405 U7.4 107.345,85.405
NetR31_1: R31.1 R43.1 | length 3.9
  Bottom Layer w0.5: R31.1 103.15,109.75 103.65,109.25 103.65,107.55 R43.1
NetR31_2: "X8 LCD.15" R31.2 | length 4.4
  Bottom Layer w0.5: R31.2 99.1,111.35 100.75,113 100.75,113.5
NetR32_1: R32.1 R38.2 U7.5 | length 11.1
  Bottom Layer w0.3: R32.1 111.25,87.5 112.155,86.595 112.155,85.655 112,85.5 110.995,85.5 U7.5
  Bottom Layer w0.5: R38.2 108.5,91.3 109.9,89.9 R32.1
NetR36_1: "X1 SWD.2" R36.1 | length 5.1
  Bottom Layer w0.5: 139.55,101.6 139.55,100.45 141.35,98.65 R36.1
NetR37_1: "X1 SWD.4" R37.1 | length 4.5
  Bottom Layer w0.5: R37.1 133.6,100.65 134.55,101.6
NetR38_1: "X4 Sound.1" R38.1 | length 4.9
  Bottom Layer w0.5: R38.1 108.5,97.5 109.29,98.29 109.29,100.5
NetR39_1: "X4 Sound.2" R39.1 | length 5.1
  Bottom Layer w0.5: R39.1 105.5,97.5 106.75,98.75 106.75,100.5
NetR39_2: R39.2 U7.8 | length 15.1
  Bottom Layer w0.3: R39.2 105.5,91.75 106.25,91 107,91 108.5,89.5 108.5,85.5 109,85 109,81.94 109.345,81.595 U7.8
"NetX7 BATTERY_1": "X7 BATTERY.1" "X10 ON/OFF.1" | length 7.9
  Bottom Layer w1: 54.25,82.5 54.25,85 55,85.75 56,85.75 56.75,86.5 56.75,88.75
NRST: C12.2 U2.7 | length 9.2
  Bottom Layer w0.3: C12.2 132.75,70.25 133.25,70.75 133.25,73.75 134.25,74.75 U2.7
PWM: R201.2 U2.13 | length 67.8
  Top Layer w0.5: R201.2@90.75,108.75 99,108.75 100.75,107 100.75,98.75 118,81.5 118,73.75 119.75,72 122.5,72 126.25,75.75 v1(126.25,76.75)
  Bottom Layer w0.3: 129.7,78.25 U2.13
  Bottom Layer w0.5: v1(126.25,76.75) 128.2,76.75 129.7,78.25
SIN_C: R1.1 U2.15 | length 47.9
  Top Layer w0.5: v1(94.5,61.25) 104.5,61.25 112.625,69.375 v1@113.375,69.375
  Bottom Layer w0.3: v1(113.5,70.5) 116.5,73.5 116.5,76.5 117.75,77.75 119.75,77.75 121.75,79.75 128.25,79.75 128.5,80 U2.15
  Bottom Layer w0.5: v1(94.5,61.25) 94.5,58.4 R1.1@94.65,58.25
SOUND: C31.2 U2.14 | length 28.6
  Top Layer w0.5: v1(122,93) 122,79 122.5,78.5 v1(122.5,77.5)
  Bottom Layer w0.3: v1(122.5,77.5) 124,79 128.75,79 129.25,79.5 U2.14
  Bottom Layer w0.5: C31.2 122,89.35 v1(122,93)
SWCLK: D10.3 R36.2 U2.37 | length 36.4
  Bottom Layer w0.3: U2.37 139.5,84.5 140.875,85.875 141.375,85.875 142.531,87.031 142.781,87.031 144.25,88.5 145.25,88.5 146,89.25 146,93.25 144.15,95.1
  Bottom Layer w0.5: D10.3 135.25,106.75 136.25,105.75 142,105.75 144.75,103 144.75,100 144.15,99.4 R36.2 144.15,95.1
SWDIO: D11.3 R37.2 U2.34 | length 14.1
  Bottom Layer w0.3: U2.34 136.25,87.25 136.75,87.75 136.75,92.25
  Bottom Layer w0.5: R37.2 136.4,94 ; 136.75,92.25 136.75,92.75 136.4,93.1 136.4,94 ; D11.3 136.4,94
TEST: U2.22
TX: R17.1 U2.21 | length 29
  Bottom Layer w0.3: R17.1 109.75,76.25 112.25,78.75 114.5,78.75 116,80.25 118.25,80.25 119.5,81.5 119.5,84.5 120,85 122.75,85 124.25,83.5 125.5,83.5 125.75,83.25 127.15,83.25 127.4,83 U2.21
U_RX: C9.1 R13.2 U2.17 | length 41.6
  Top Layer w0.5: v1(102.25,66.5) 104.5,66.5 v1(113.75,75.75)
  Bottom Layer w0.3: v1@113.75,76.5 115,76.5 117.25,78.75 119.25,78.75 121.25,80.75 128,80.75 128.25,81 U2.17
  Bottom Layer w0.5: R13.2 94.95,65.8 96.5,65.8 97.1,66.4 C9.1 99.1,66.5 v1(102.25,66.5)
UP_CTR: C19.1 R20.1 R21.2 U2.11 | length 46.1
  Bottom Layer w0.3: 102.5,75 103,74.5 105.5,74.5 106.5,73.5 106.5,71.5 109.25,68.75 ; R20.1 114.25,66.75 120,72.5 122.25,72.5 122.75,73 127,73 129.25,75.25 131.25,75.25 132.25,76.25 U2.11
  Bottom Layer w0.5: R21.2 C19.1 100.15,75 102.5,75 ; 109.25,68.75 111.25,68.75 111.9,68.1 R20.1
URX: R33.2 U2.31 | length 19.7
  Bottom Layer w0.3: 126.75,99.25 135,91 135,87.75 134.75,87.5 U2.31
  Bottom Layer w0.5: 126.75,99.25 R33.2@126.75,102
USART_RX: "X2 USART.1" R33.1 | length 6.2
  Bottom Layer w0.5: 122,107.5 122,105.5 123.75,103.75 R33.1@123.75,102
USART_TX: "X2 USART.3" R34.1 | length 6
  Bottom Layer w0.5: 117,107.5 117,106 118.25,104.75 R34.1@118.25,102
UTX: R34.2 U2.30 | length 23.6
  Bottom Layer w0.3: 124.75,99.75 134.25,90.25 134.25,88 U2.30
  Bottom Layer w0.5: R34.2@121.25,102.25 121.25,100.25 121.75,99.75 124.75,99.75
VDD: "X1 SWD.1" C13.2 C21.2 C22.2 C24.2 C25.2 C26.2 C27.2 P1.3 R22.1 R23.1 R202.2 U2.1 U2.24 U2.36 U2.48 U3.2 U3.4 U4.8 | length 227.8
  Top Layer w0.5: R202.2 95.25,112.25 97.5,110 109.75,110 121.75,98 141.75,98 142.05,98.3 142.05,101.6 ; v1(115,62) 115.25,62 120.063,66.813 122.813,66.813 129.688,73.688 129.688,76.438 134.5,81.25 135,81.25 ; v1(125.5,89.75) 126.5,89.75 133.5,82.75 135,81.25 ; v4(144,92.25) 144,90.25 135,81.25 ; v1(146.5,74.25) 146.5,74.5 145,76 140.25,76 135,81.25
  Bottom Layer w0.3: C26.2@126.75,86.65 C26.2 126.9,85.6 127.625,84.875 129.125,84.875 129.5,84.5 U2.24 ; U2.1 137.25,76.75 137.75,76.25 138.75,76.25 139.25,75.75 ; U2.36 137.25,86.793 138.457,88 139.75,88 141.15,89.4 C25.2 ; U2.48 139.5,79 140.5,78 140.5,75.75 C22.2 139.25,75.75 ; R22.1 141.25,66.5 141.75,67 141.75,68.9 R23.1 ; U4.8 141.405,64.155 142.75,65.5 C24.2 144.1,67.65 142.75,69 R23.1 ; v1(146.5,74.25) 146.92,74.25 P1.3 ; 139.25,75.75 138.5,75 138.5,72 140,70.5 141,70.5 141.65,69.85 R23.1
  Bottom Layer w0.5: U3.4@103.35,62.3 U3.4 103.85,62.5 107.75,62.5 108.5,61.75 C13.2 C21.2 112.4,60.65 112.75,61 113.5,61 113.75,61.25 114.25,61.25 v1(115,62) ; v1(125.5,89.75) 126.75,88.5 C26.2@126.75,86.65 ; C22.2 C27.2 140.35,72.15 141,71.5 145.25,71.5 146.5,72.75 v1(146.5,74.25) ; C25.2 142.25,90.5 v4(144,92.25) 142.75,93.5 142.75,99.25 142.75,100.9 142.05,101.6
  Bottom Layer w1: U3.2 U3.4
VDDA: C15.1 C18.2 C20.2 C28.2 R18.2 U1.8 U2.9 U5.2 U5.4 VD1.2 | length 101.8
  Top Layer w0.5: v5(94,73.25) 94,70 95.5,68.5 v6(97,68.5)
  Bottom Layer w0.3: 130,74 131,74 133.25,76.25 U2.9
  Bottom Layer w0.5: VD1.2 R18.2@71.94,66.96 ; R18.2 75,66.9 75,67 ; U1.8 75.345,66.655 75,67 ; U5.2 U5.4 ; C28.2 C28.2@91.25,73 ; U5.4@91.8,78.15 U5.4 ; v5(94,73.25) 93.5,72.75 91,72.75 C28.2@91.25,73 ; C20.2@122.6,71.25 120.25,71.25 113.75,64.75 107,64.75 103,68.75 101,68.75 100.75,68.5 v6(97,68.5) 94.25,68.5 93.75,69 85.75,69 83.75,71 77.2,71 76.6,70.4 C15.1 75.5,69 75,68.5 75,67 ; C20.2 C18.2 126.65,71.15 129.5,74 130,74 ; C28.2@91.25,73 92,73.75 92,77.65 U5.4
VDDLCD: "X8 LCD.2" C51.1 U9.2 U9.4 | length 59.7
  Bottom Layer w0.5: U9.2 U9.4 89.4,112.5 C51.1 90.65,112.4 95.5,117.25 132,117.25 133.25,116 133.25,113.5
ZERO: R4.1 U1.6 U1.7 | length 28.7
  Bottom Layer w0.5: R4.1 70.75,58.4 70.75,56.25 71.5,55.5 76.75,55.5 77.5,56.25 77.5,60.25 79,61.75 79,63.5 78.76,63.74 78.385,64.115 U1.6 75.135,64.115 74.75,64.5 74.75,65 75.135,65.385 U1.7
pads on no net: "X8 LCD.7" "X8 LCD.8" "X8 LCD.9" "X8 LCD.10" D10.2 D11.2 P1.1 U2.4 U2.10 U2.16 U2.18 U2.29 U2.32 U4.1 U4.2 U4.3

## Polygon pours and split planes (outlines as drawn)
GND on Bottom Layer "Top Layer-No Net" (solid, remove dead copper, pour order 33): 103,80 103,50.5 135.75,50.5 135.75,80 103,80
GND on Bottom Layer "Top Layer-No Net" (solid, remove dead copper, pour order 31): 58.5,60.25 58.5,50.5 75.25,50.5 75.25,60.25 58.5,60.25
GND on Bottom Layer "Top Layer-No Net" (solid, remove dead copper, pour order 30): 50.25,58.858 59.69,58.858 61.143,58.858 74.214,54.157 74.214,50.5 96,50.5 96,68 50.25,68 50.25,58.858
GND on Bottom Layer "Top Layer-No Net" (solid, remove dead copper, pour order 29): 50.5,103.5 54.185,103.5 55.525,104.112 56.75,105.086 58.75,108.25 62.224,108.25 101.75,108.25 101.75,71.25 50.5,71.25 50.5,104.112
GND on Bottom Layer "GND_D4" (solid, remove dead copper, pour order 38): 138,78.25 138,85.25 130.25,85.25 130.25,78.25 138,78.25
GND on Bottom Layer "GND_D1" (solid, remove dead copper, pour order 39): 150.5,112.25 160,112.25 160,67.75 150.5,67.75 150.5,112.25
GND on Bottom Layer "GND_D2" (solid, remove dead copper, pour order 41): 151.25,50.5 151.25,120.75 120.25,120.75 120.25,50.5
VDD on Bottom Layer "VDD" (solid, pour order 42): 101.05,59.75 106,59.75 106,64 101.05,64 101.05,59.75
+5V on Bottom Layer "+5v" (solid, pour order 44): 74,88.875 74,84.625 78.75,84.625 78.75,88.875 74,88.875
VDDLCD on Bottom Layer "VDDLCD" (solid, pour order 46): 82.25,114.75 82.25,110 86.75,110 86.75,114.75 82.25,114.75
VDDA on Bottom Layer "VDDA" (solid, pour order 48): 89.5,80.5 89.5,75.5 93.5,75.5 93.5,80.5 89.5,80.5
GND on Bottom Layer "GND" (solid, remove dead copper, pour order 51): 116.25,81.75 120.75,81.75 120.75,50.5 116.25,50.5 116.25,81.75
GND on Bottom Layer "GND" (solid, pour order 40): 54.25,59.25 59,54.25 59,59.25 54.25,59.25
GND on Bottom Layer "GND" (solid, pour order 43): 155,68 150.75,62.25 150.75,68 155,68
GND on Bottom Layer "GND" (solid, pour order 45): 151,117 156,112 151,112 151,117
GND on Bottom Layer "Top Layer-No Net" (solid, remove dead copper, pour order 32): 58.75,120.75 58.75,108.75 92.25,108.75 92.25,120.75 58.75,120.75
GND on Top Layer "Top Layer-No Net" (solid, remove dead copper, pour order 30): 103,109.75 103,78.75 121.5,78.75 121.5,109.75 103,109.75
GND on Top Layer "Top Layer-No Net" (solid, remove dead copper, pour order 37): 58.75,120.75 58.75,106.75 90.75,106.75 90.75,120.75 58.75,120.75
GND on Top Layer "Top Layer-No Net" (solid, remove dead copper, pour order 36): 103,80 103,50.5 135.75,50.5 135.75,80 103,80
GND on Top Layer "Top Layer-No Net" (solid, remove dead copper, pour order 35): 50.5,71.25 50.5,103.5 54,103.5 55.25,103.5 58.25,106.5 58.75,107 58.75,108.25 101.75,108.25 101.75,71.25 50.5,71.25 50.5,103.5
GND on Top Layer "Top Layer-No Net" (solid, remove dead copper, pour order 34): 50.25,68 50.25,58.75 54.75,58.75 58.5,55 58.5,50.5 96,50.5 96,68 50.25,68
GND on Top Layer "GND" (solid, remove dead copper, pour order 53): 120.25,120.75 151.25,120.75 151.25,50.5 120.25,50.5 120.25,120.75
GND on Top Layer "GND" (solid, remove dead copper, pour order 54): 150.25,112.25 160,112.25 160,67.75 150.25,67.75 150.25,112.25
GND on Top Layer "GND" (solid, remove dead copper, pour order 55): 103,109.25 150.5,109.25 150.5,50.5 103,50.5 103,109.25
GND on Top Layer "GND_D3_top" (solid, remove dead copper, pour order 56): 91.5,120.75 91.5,103.75 141,103.75 141,120.75 91.5,120.75
GND on Top Layer "GND" (solid, pour order 47): 59.25,107.5 54.75,103 59.25,103 59.25,107.5
GND on Top Layer "GND" (solid, pour order 49): 54,59.5 58.75,54.5 58.75,59.5 54,59.5
GND on Top Layer "GND" (solid, pour order 50): 155.25,68.25 150.75,62.25 150.75,68.25 155.25,68.25
GND on Top Layer "GND" (solid, pour order 52): 150.75,117.25 156.25,111.75 150.75,111.75 150.75,117

## Keep-outs
Keep-Out Layer:
  circle w0.254: c63.175,55.5 r2
  circle w0.254: c63.175,115.7 r2
  circle w0.254: c146.975,115.7 r2
  circle w0.254: c146.975,55.5 r2

## Silkscreen, mask and mechanical layers (free items; w line width, h text height)
Top Overlay:
  circle w0.2: c63.17,55.494 r3.3
  circle w0.2: c63.17,115.694 r3.3
  circle w0.2: c146.97,55.494 r3.3
  circle w0.2: c146.97,115.694 r3.3
  circle w0.2: c146.97,55.494 r1
  circle w0.2: c146.97,115.694 r1
  circle w0.2: c63.17,55.494 r1
  circle w0.2: c63.17,115.694 r1
Mechanical 1:
  the board outline again, w0.2